# Altium PCB PCB1.PcbDoc
Units mm, origin at the board's own origin, x right, y up, seen from the top; angles counter-clockwise.
Board outline 89.87 x 54.32 mm, 2 copper layers (Top Layer, Bottom Layer); 43 components, 36 nets, 163 pads, 66 vias.
Unrouted connection lines stored in the file: 14.
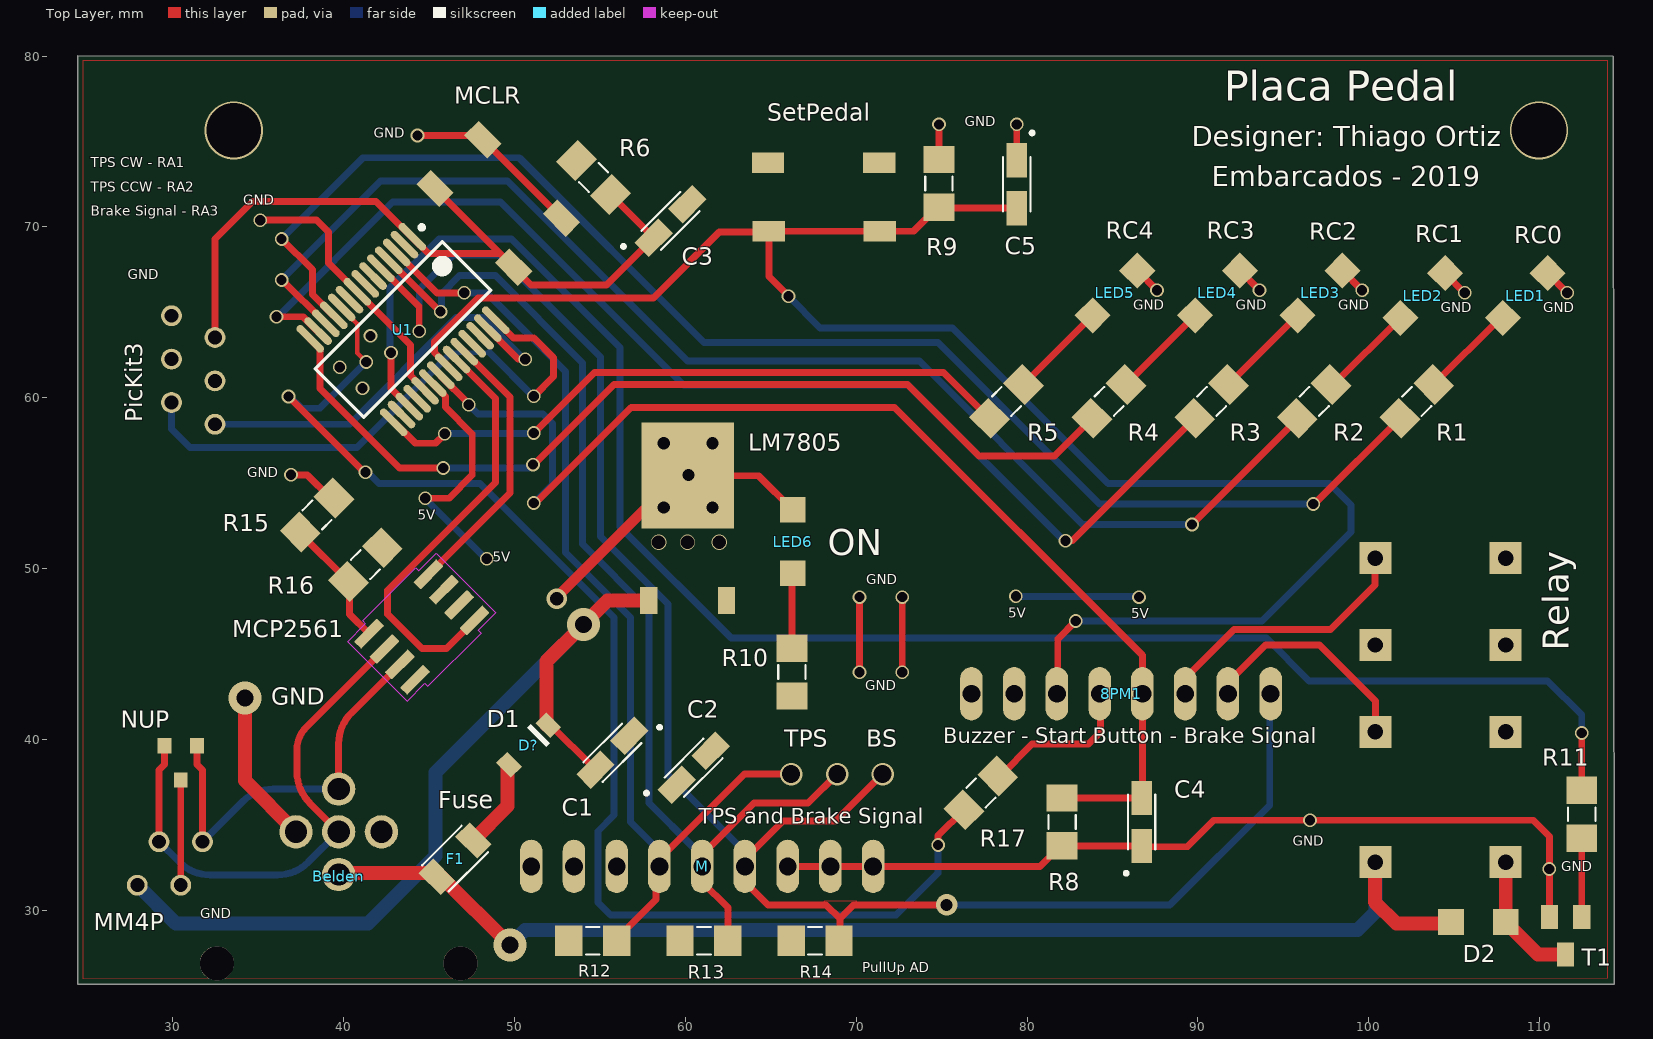
[diagram p0: Top Layer view]
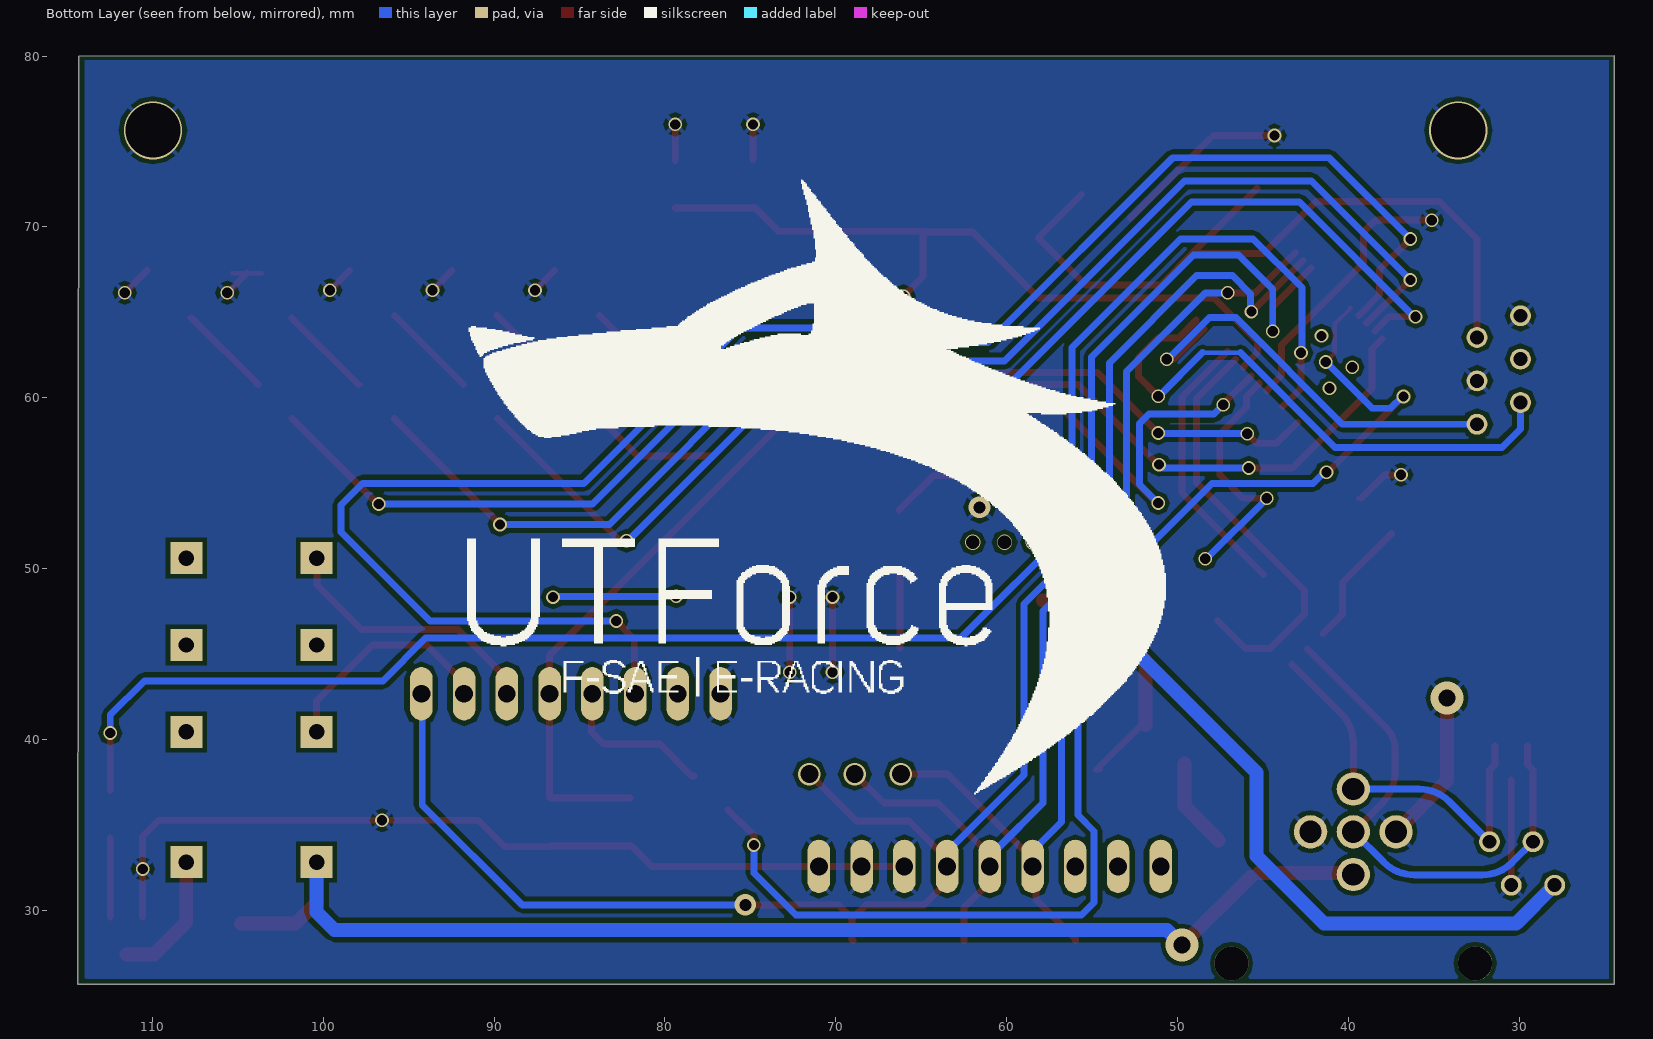
[diagram p1: Bottom Layer view, seen from below]

## Layer stack, top to bottom
Top Solder: solder mask 0.0102, Solder Resist, Dk 3.5
Top Layer: signal copper 0.0356
Dielectric 1: dielectric 0.32, FR-4, Dk 4.8
Bottom Layer: signal copper 0.0356
Bottom Solder: solder mask 0.0102, Solder Resist, Dk 3.5

## Board outline
24.476,25.7 24.476,80.016 24.475,80.016 114.302,79.997 114.35,25.7

## Design rules (kind name [scope] priority, off if disabled: settings)
Clearance [All] p1: gap=0.254 ignorepadtopadclearanceinfootprint=FALSE except(0: Arc-Hole Track-Hole SMDPad-Hole THPad-Hole Via-Hole Fill-Hole Poly-Hole Region-Hole Text-Hole)
PolygonConnect PolygonConnect_20 [All vs IsNamedPolygon('5V')] p1: connectstyle=Relief reliefconductorwidth=0.254 reliefentries=4 polygonreliefangle="45 Angle" airgapwidth=0.254
PolygonConnect PolygonConnect_19 [All vs IsNamedPolygon('5V')] p2: connectstyle=Relief reliefconductorwidth=0.254 reliefentries=4 polygonreliefangle="90 Angle" airgapwidth=0.254
PolygonConnect PolygonConnect_18 [All vs IsNamedPolygon('Bottom Layer-GND')] p3: connectstyle=Relief reliefconductorwidth=0.254 reliefentries=4 polygonreliefangle="45 Angle" airgapwidth=0.254
PolygonConnect PolygonConnect_17 [All vs IsNamedPolygon('GND')] p4: connectstyle=Direct reliefconductorwidth=0.254 reliefentries=4 polygonreliefangle="90 Angle" airgapwidth=0.254
PolygonConnect PolygonConnect_16 [All vs IsNamedPolygon('5V')] p5: connectstyle=Direct reliefconductorwidth=0.254 reliefentries=4 polygonreliefangle="90 Angle" airgapwidth=0.254
PolygonConnect PolygonConnect_15 [All vs IsNamedPolygon('5V')] p6: connectstyle=Relief reliefconductorwidth=0.254 reliefentries=4 polygonreliefangle="45 Angle" airgapwidth=0.254
PolygonConnect PolygonConnect_14 [All vs IsNamedPolygon('GND')] p7: connectstyle=Relief reliefconductorwidth=0.254 reliefentries=4 polygonreliefangle="45 Angle" airgapwidth=0.254
PolygonConnect PolygonConnect_13 [All vs IsNamedPolygon('GND')] p8: connectstyle=Direct reliefconductorwidth=0.254 reliefentries=4 polygonreliefangle="90 Angle" airgapwidth=0.254
PolygonConnect PolygonConnect_12 [All vs IsNamedPolygon('5V')] p9: connectstyle=Direct reliefconductorwidth=0.254 reliefentries=4 polygonreliefangle="90 Angle" airgapwidth=0.254
PolygonConnect PolygonConnect_11 [All vs IsNamedPolygon('5V')] p10: connectstyle=Relief reliefconductorwidth=0.254 reliefentries=4 polygonreliefangle="45 Angle" airgapwidth=0.254
PolygonConnect PolygonConnect_10 [All vs IsNamedPolygon('5V')] p11: connectstyle=Direct reliefconductorwidth=0.254 reliefentries=4 polygonreliefangle="90 Angle" airgapwidth=0.254
PolygonConnect PolygonConnect_9 [All vs IsNamedPolygon('5V')] p12: connectstyle=Direct reliefconductorwidth=0.254 reliefentries=4 polygonreliefangle="90 Angle" airgapwidth=0.254
PolygonConnect PolygonConnect_8 [All vs IsNamedPolygon('5V')] p13: connectstyle=Direct reliefconductorwidth=0.254 reliefentries=4 polygonreliefangle="90 Angle" airgapwidth=0.254
PolygonConnect PolygonConnect_7 [All vs IsNamedPolygon('5V')] p14: thpad.connectstyle=Direct thpad.reliefconductorwidth=0.254 thpad.reliefentries=4 thpad.polygonreliefangle="90 Angle" thpad.airgapwidth=0.254 smdpad.connectstyle=Direct smdpad.reliefconductorwidth=0.254 smdpad.reliefentries=4 smdpad.polygonreliefangle="90 Angle" smdpad.airgapwidth=0.254 via.connectstyle=Relief via.reliefconductorwidth=0.254 via.reliefentries=4 via.polygonreliefangle="90 Angle" via.airgapwidth=0.254
PolygonConnect PolygonConnect_6 [All vs IsNamedPolygon('GND')] p15: thpad.connectstyle=Direct thpad.reliefconductorwidth=0.254 thpad.reliefentries=4 thpad.polygonreliefangle="90 Angle" thpad.airgapwidth=0.254 smdpad.connectstyle=Direct smdpad.reliefconductorwidth=0.254 smdpad.reliefentries=4 smdpad.polygonreliefangle="90 Angle" smdpad.airgapwidth=0.254 via.connectstyle=Relief via.reliefconductorwidth=0.254 via.reliefentries=4 via.polygonreliefangle="90 Angle" via.airgapwidth=0.254
PolygonConnect PolygonConnect_5 [All vs IsNamedPolygon('GND')] p16: thpad.connectstyle=Direct thpad.reliefconductorwidth=0.254 thpad.reliefentries=4 thpad.polygonreliefangle="90 Angle" thpad.airgapwidth=0.254 smdpad.connectstyle=Direct smdpad.reliefconductorwidth=0.254 smdpad.reliefentries=4 smdpad.polygonreliefangle="90 Angle" smdpad.airgapwidth=0.254 via.connectstyle=Relief via.reliefconductorwidth=0.254 via.reliefentries=4 via.polygonreliefangle="90 Angle" via.airgapwidth=0.254
PolygonConnect PolygonConnect_4 [All vs IsNamedPolygon('GND')] p17: thpad.connectstyle=Relief thpad.reliefconductorwidth=0.254 thpad.reliefentries=4 thpad.polygonreliefangle="45 Angle" thpad.airgapwidth=0.254 smdpad.connectstyle=Relief smdpad.reliefconductorwidth=0.254 smdpad.reliefentries=4 smdpad.polygonreliefangle="45 Angle" smdpad.airgapwidth=0.254 via.connectstyle=Relief via.reliefconductorwidth=0.254 via.reliefentries=4 via.polygonreliefangle="90 Angle" via.airgapwidth=0.254
PolygonConnect PolygonConnect_3 [All vs IsNamedPolygon('Top Layer-GND')] p18: thpad.connectstyle=Relief thpad.reliefconductorwidth=0.254 thpad.reliefentries=4 thpad.polygonreliefangle="45 Angle" thpad.airgapwidth=0.254 smdpad.connectstyle=Relief smdpad.reliefconductorwidth=0.254 smdpad.reliefentries=4 smdpad.polygonreliefangle="45 Angle" smdpad.airgapwidth=0.254 via.connectstyle=Relief via.reliefconductorwidth=0.254 via.reliefentries=4 via.polygonreliefangle="90 Angle" via.airgapwidth=0.254
PolygonConnect PolygonConnect_2 [InNet('GND') vs IsNamedPolygon('Top Layer-GND')] p19: connectstyle=Relief reliefconductorwidth=0.254 reliefentries=4 polygonreliefangle="90 Angle" airgapwidth=0.254
PolygonConnect PolygonConnect_1 [All vs InNet('GND')] p20: connectstyle=Relief reliefconductorwidth=0.254 reliefentries=4 polygonreliefangle="45 Angle" airgapwidth=0.254
PolygonConnect [All] p21: connectstyle=Relief reliefconductorwidth=0.254 reliefentries=4 polygonreliefangle="90 Angle" airgapwidth=0.254
RoutingVias [All] p1: holewidth=0.711 width=1.27 viastyle="Through Hole" minholewidth=0.711 minwidth=1.27 maxholewidth=0.711 maxwidth=1.27
SolderMaskExpansion [All] p1: expansion=0.102
Width [All] p1: maxlimit=0.254 minlimit=0.254 preferedwidth=0.254
30 further rules are at their usual default settings.

## Components (designator, comment, footprint, x,y, rotation, side; value= is the part's Value field where it differs from the comment)
8PM1 "8PMolex" PCBComponent_1#1 94.25,42.7 r180 top
Belden "RSWF-5" RSWF-5 39.738,34.624 r0 top locked
C1 "10uF" *CAPMP3216X166 55.75,39.25 r225 top
C2 "" *CAPMP3216X166 60.5,38.369 r45 top
C3 "33uF" *CAPMP3216X166 59.15,70.35 r45 top
C4 "33uF" *CAPMP3216X166 86.7,35.2 r90 top
C5 "33uF" *CAPMP3216X166 79.4,72.5 r270 top
D2 "SMD-DIODE-SWITCHING-75V-150MA(D1206)" *LED-1206_SMD-DIODE-SWITCHING-75V-150MA(D1206)(Primary) 106.4,29.35 r180 top
D? "D1" *SOD123FL_SMF5.0AT1G(Primary) 50.85,39.7 r225 top
F1 "Fuse" *RESC3216X125N 46.547,33.05 r45 top
LED1 "RC0" PCBComponent_1#2 -1189,162.83 r45 top
LED2 "RC1" PCBComponent_1#2 -1195,162.83 r45 top
LED3 "RC2" PCBComponent_1#2 -1201,162.98 r45 top
LED4 "RC3" PCBComponent_1#2 -1207,162.98 r45 top
LED5 "RC4" PCBComponent_1#2 -1213,162.98 r45 top
LED6 "ON" PCBComponent_1#2 -920.1,-797.85 r90 top
LM7805 "Component_1" PCBComponent_1#3 57.8,48.125 r0 top locked
M "9PMolex" PCBComponent_1#4 51,32.6 r0 top locked
MCLR "ButtomSMD" PCBComponent_1#5 49.975,67.65 r135 top (schematic designator buttomMCLR)
MCP2561 "MCP2561 Series High-Speed 1 Mbps 5 V 5 uA CAN Transceiver - SOIC-8" SOIC127P600X175-8N 44.6,46.6 r225 top
MM4P "MM-4P" MICROMATCH-4 29.865,32.77 r180 top
NUP "NUP2105L" NUP2105L 30.5,38.65 r180 top
PicKit3 "MM-6P" MICROMATCH-6 31.23,61.635 r90 top
R1 "330R" *RESC3216X90 102.8,59.8 r45 top
R2 "330R" *RESC3216X90 96.8,59.8 r45 top
R3 "330R" *RESC3216X90 90.8,59.8 r45 top
R4 "330R" *RESC3216X90 84.8,59.8 r45 top
R5 "330R" *RESC3216X90 78.8,59.8 r45 top
R6 "1700R" *RESC3216X90 54.65,72.9 r315 top
R8 "1700R" *RESC3216X90 82.05,35.2 r270 top
R9 "1700R" *RESC3216X90 74.85,72.55 r90 top
R10 "1700R" *RESC3216X90 66.25,43.965 r90 top
R11 "1700R" *RESC3216X90 112.45,35.65 r270 top
R12 "CRCW120635K7FKEA" *RESC3216X90 54.6,28.25 r0 top
R13 "CRCW120635K7FKEA" *RESC3216X90 61.1,28.25 r0 top
R14 "CRCW120635K7FKEA" *RESC3216X90 67.6,28.25 r0 top
R15 "CRCW120635K7FKEA" *RESC3216X90 38.48,53.15 r225 top
R16 "CRCW120635K7FKEA" *RESC3216X90 41.3,50.25 r45 top
R17 "CRCW120635K7FKEA" *RESC3216X90 77.3,36.9 r225 top
Relay "â€¢ Ideal para uso em telecomunicaÃ§Ãµes â€¢ 2 contatos reversÃ­veis bifurcados â€¢ ComutaÃ§Ã£o de cargas a partir de 10 ï­A â€¢ Montagem direta em circuito impresso â€¢ Selado â€¢ Homologado ULâ€¢ 2 contatos reversÃ­veis bifurcados â€¢ ComutaÃ§Ã£o de cargas a partir de 10 ï­A â€¢ Montagem direta em circuito impresso â€¢ Selado â€¢ Homologado UL" ML2RC5 105.46,48.09 r90 top
SetPedal "ButtomSMD" PCBComponent_1#5 64.85,73.75 r0 top (schematic designator SetPedalButtom)
T1 "TBJSOT23" PCBComponent_1#6 112.45,29.65 r180 top
U1 "PIC18F26K80-I/SS" MCHP-SSOP-SS28_L 43.5,64 r315 top

## Footprints (in the part's own frame and the unit in brackets; to place one, negate y for a bottom-side part, rotate by r counter-clockwise, add the part's x,y. Pads: shape width x height; smd on the part's side, far side on the other; paste and mask are expansions set on the pad)
*CAPMP3216X166 [mm]
  rect 2x1.2 smd: 1(1.4,0) 2(-1.4,0)
  silkscreen extent -3.1,-0.8 1.6,1
*LED-1206_SMD-DIODE-SWITCHING-75V-150MA(D1206)(Primary) [mm]
  rect 1.5x1.5 smd: NEG(1.6,0) POS(-1.6,0)
*RESC3216X90 [mm]
  rect 1.6x1.8 smd: 1(-1.4,0) 2(1.4,0)
  silkscreen extent -0.4,-0.8 0.4,0.8
*RESC3216X125N [mm]
  rect 1.2x1.82 smd: 1(-1.505,0) 2(1.505,0)
  silkscreen extent -1.63,-1.09 1.63,1.09
*SOD123FL_SMF5.0AT1G(Primary) [mm]
  rect 0.91x1.22 smd: A(1.625,0) C(-1.625,0)
  silkscreen extent -0.95,-0.78 -0.65,0.8
MCHP-SSOP-SS28_L [mm] "SOP, 28-Leads, Body 10.2x5.3mm, Pitch 0.65mm, IPC High Density"
  oval 2.1x0.45 smd: 1(-3.45,4.225) 2(-3.45,3.575) 3(-3.45,2.925) 4(-3.45,2.275) 5(-3.45,1.625) 6(-3.45,0.975) 7(-3.45,0.325) 8(-3.45,-0.325) 9(-3.45,-0.975) 10(-3.45,-1.625) 11(-3.45,-2.275) 12(-3.45,-2.925) 13(-3.45,-3.575) 14(-3.45,-4.225) 15(3.45,-4.225) 16(3.45,-3.575) 17(3.45,-2.925) 18(3.45,-2.275) 19(3.45,-1.625) 20(3.45,-0.975) 21(3.45,-0.325) 22(3.45,0.325) 23(3.45,0.975) 24(3.45,1.625) 25(3.45,2.275) 26(3.45,2.925) 27(3.45,3.575) 28(3.45,4.225)
  silkscreen extent -3.57,-5.25 2,5.25, body extent -2.8,-5.25 2.8,5.25, height 2
MICROMATCH-4 [mil]
  round 48 / inner round 60 / far side round 48 hole 32: 1(75,50) 2(25,-50) 3(-25,50) 4(-75,-50)
MICROMATCH-6 [mil]
  round 48 / inner round 60 / far side round 48 hole 32: 1(125,50) 2(75,-50) 3(25,50) 4(-25,-50) 5(-75,50) 6(-125,-50)
ML2RC5 [mm]
  rect 1.869x1.869 / inner rect 1.524x1.524 / far side rect 1.869x1.869 hole 0.9: 1(-15.24,5.08) 4(-7.62,5.08) 6(-2.54,5.08) 8(2.54,5.08) 9(2.54,-2.54) 11(-2.54,-2.54) 13(-7.62,-2.54) 16(-15.24,-2.54)
  round 0.9 on Top Paste: MH1(-15.24,5.08) MH2(-7.62,5.08) MH3(-2.54,5.08) MH4(2.54,5.08) MH8(-15.24,-2.54)
  round 0.9 hole 0.9 unplated: MH5(2.54,-2.54) MH6(-2.54,-2.54) MH7(-7.62,-2.54)
NUP2105L [mm]
  rect 0.8x0.9 smd: 1(-0.95,-1) 2(0.95,-1) 3(0,1)
PCBComponent_1#1 [mm]
  oval 1.32x3.12 hole 1.04: 1(0,0) 2(2.5,0) 3(5,0) 4(7.5,0) 5(10,0) 6(12.5,0) 7(15,0) 8(17.5,0)
PCBComponent_1#2 [mm]
  rect 1.5x1.5 smd: 1(847.6,-986.4) 2(851.3,-986.4)
  silkscreen extent 846.7,-988.25 852.2,-985.5
PCBComponent_1#3 [mm]
  rect 1x1.6 smd: 5V(4.625,0.025) 12V(0.075,0.025)
  rect 5.4x6.2 smd: GND(2.35,7.325)
PCBComponent_1#4 [mm]
  oval 1.32x3.12 hole 1.04: 1(0,0) 2(2.5,0) 3(5,0) 4(7.5,0) 5(10,0) 6(12.5,0) 7(15,0) 8(17.5,0) 9(20,0)
PCBComponent_1#5 [mm]
  rect 1.9x1.2 smd: 1(0,0) 1(6.5,0) 2(0.05,-4) 2(6.55,-4)
PCBComponent_1#6 [mm]
  rect 1x1.4 smd: B(0,0) C(0.95,2.2) E(1.9,0)
RSWF-5 [mm]
  round 1.95 / inner round 1.524 / far side round 1.95 hole 1.3: 1(2.5,0) 2(0,-2.5) 3(-2.5,0) 4(0,2.5) 5(0,0)
  round 2 hole 2 unplated: MH1(7.125,-7.7) MH2(-7.125,-7.7)
SOIC127P600X175-8N [mm]
  rrect15% 1.9x0.6 smd: 1(-2.455,1.905) 2(-2.455,0.635) 3(-2.455,-0.635) 4(-2.455,-1.905) 5(2.455,-1.905) 6(2.455,-0.635) 7(2.455,0.635) 8(2.455,1.905)
  Top Layer keep-out lines w0.05: 3.66,-2.46 3.66,2.46 2.2,2.46 2.2,2.7 -2.2,2.7 -2.2,2.46 -3.66,2.46 -3.66,-2.46 -2.2,-2.46 -2.2,-2.7 2.2,-2.7 2.2,-2.46 3.66,-2.46

## Part data
C1 C2 C3 C4 C5: library part 12061A102KAT2A, "1206 1 nF 100 V ±10% Tolerance C0G/NP0 SMT Multilayer Ceramic Capacitor", Package="1206 AVX", Digi-Key_Part_Number=478-5168-1-ND, Digi-Key_Purchase_URL=https://www.digikey.com/product-detail/en/avx-corporation/12061A102KAT2A/478-5168-1-ND/1913258?utm_source=snapeda&utm_medium=aggregator&utm_campaign=symbol, MF=AVX, MP=12061A102KAT2A, SnapEDA_Link=https://www.snapeda.com/parts/12061A102KAT2A/AVX/view-part/?ref=snap
D2: "Diode Small Signal Switching 100V 0.15A 2-Pin Case 1206", Package="1206 Bourns", Availability=Unavailable, MF=Bourns, MP=CD1206-S01575, Price=None, SnapEDA_Link=https://www.snapeda.com/parts/CD1206-S01575/Bourns%20-%20J.W.%20Miller/view-part/?ref=snap
D?: library part SMF5.0AT1G, "Tvs Diode, 200w, 5v, Sod-123fl, Full Reel", Package="SOD-123 Littelfuse", Availability=Unavailable, MF="Littelfuse Inc.", MP=SMF5.0AT1G, Price=None, SnapEDA_Link=https://www.snapeda.com/parts/SMF5.0AT1G/Littelfuse%20Inc./view-part/?ref=snap
F1: library part 0ZCA0075FF2G, "PTC Resettable Fuse 0.75A_hold_ 1.5A_trip_ 6VDC 100A 0.6W 0.2s 0.09Ohm SMD Solder Pad 1206 T/R", Package="1206 Bel Fuse", Availability=Unavailable, MF="Bel Fuse", MP=0ZCA0075FF2G, Price=None, SnapEDA_Link=https://www.snapeda.com/parts/0ZCA0075FF2G/Bel%20Fuse%20Inc./view-part/?ref=snap
LED1 LED2 LED3 LED4 LED5 LED6: library part LED1206
MCP2561: library part MCP2561-E/SN, Package=SOIC127P600X175-8N, Availability=Unavailable, DeviceSetName=MCP2561-E/SN, GateName_1=G$1, LibraryName=MCP2561-E_SN, MF=Microchip, MP=MCP2561-E/SN, Price=None, SymbolName_1=MCP2561-E/SN
R1 R2 R3 R4 R5 R6 R8 R9 R10 R11: library part CRCW120635K7FKEA, "CRCW Series 1206 0.25 W 35.7 kOhm ±1 % ±100 ppm/K SMT Thick Film Chip Resistor", Package="1206 Vishay", Availability=Unavailable, MF="Vishay Dale", MP=CRCW120635K7FKEA, Price=None, SnapEDA_Link=https://www.snapeda.com/parts/CRCW120635K7FKEA/Vishay%20Dale/view-part/?ref=snap
R12 R13 R14 R15 R16 R17: "CRCW Series 1206 0.25 W 35.7 kOhm ±1 % ±100 ppm/K SMT Thick Film Chip Resistor", Package="1206 Vishay", Availability=Unavailable, MF="Vishay Dale", MP=CRCW120635K7FKEA, Price=None, SnapEDA_Link=https://www.snapeda.com/parts/CRCW120635K7FKEA/Vishay%20Dale/view-part/?ref=snap
Relay: library part ML2RC-5V, Package=ML2RC5, DeviceSetName=ML2RC-5V, GateName_1=G$1, LibraryName=ML2RC5, SymbolName_1=ML2R5V
U1: "Enhanced Flash Microcontroller with ECAN(TM) and nanoWatt XLP Technology, 64 MHz, 24 I/O, -40 to 85 degC, 28-pin SSOP (SS28), Tube", Manufacturer=Microchip, Operation Voltage Range="1.8V - 5.5V", Supplier Part Number 1=PIC18F26K80-I/SS-ND, # of A/D Channels=8, ComponentLink1Description=Datasheet, ComponentLink1URL=http://ww1.microchip.com/downloads/en/DeviceDoc/39977f.pdf, ComponentLink2Description="Package Specification", ComponentLink2URL=http://www.microchip.com/stellent/groups/techpub_sg/documents/packagingspec/en012702.pdf, ComponentLink3Description="URL Link1", ComponentLink3URL="Product URL:http://www.microchip.com/datasheet/PIC18F26K80", DatasheetVersion="Rev. F", Digital Communication="2 -A/E/USART, 0 -SPI, 1 -MSSP(SPI/I2C)", EEPROM Data Memory (bytes)=1024, I/O Pins=24, Internal Oscillator="16 MHz, 31 kHz", Max. CPU Speed MHz=64, Memory Type=Flash, Mounting Technology="Surface Mount", PackageDescription="28-Lead Plastic Shrink Small Outline, 10.2 x 5.3 mm Body, 0.65 mm Pitch", PackageReference=SSOP-SS28, PackageVersion="C04-073B, 12/2012", Packing=TUBE, PartNumber=PIC18F26K80-I/SS, Program Memory KBytes=64, Program Memory KWords=32, RAM=3648, RoHS=TRUE, Supplier 1=Digi-Key, Supplier 2=Farnell, Supplier 3=Newark, Supplier 4=Newark, Supplier 5=Mouser, Supplier Part Number 2=1823166, Supplier Part Number 3=76R6688, Supplier Part Number 4=82T9596, Supplier Part Number 5=579-PIC18F26K80-I/SS, Timers="2 - 8-bit, 3 - 16-bit, 0 - 32-bit"
Belden: DeviceSetName=RSWF-5, GateName_1=G$1, LibraryName=RSWF-5, Package=RSWF-5, SymbolName_1=RSWF-5
NUP: DeviceSetName=NUP2105L, GateName_1=G$1, LibraryName=NUP2105L-, Package=NUP2105L, SymbolName_1=NUP2105L

## Via types
v1: diameter 0.8, hole 0.6, Top Layer to Bottom Layer, 48 vias
v2: diameter 1.27, hole 0.711, Top Layer to Bottom Layer, 6 vias
v3: diameter 1.32, hole 1.04, Top Layer to Bottom Layer, 3 vias
v4: diameter 1.93, hole 1, Top Layer to Bottom Layer, 3 vias
v5: diameter 0.9, hole 0.8, Top Layer to Bottom Layer, 3 vias
v6: diameter 3.4, hole 3.2, Top Layer to Bottom Layer, 2 vias
v7: diameter 1.2, hole 0.8, Top Layer to Bottom Layer, 1 vias

## Nets (pads, with @x,y where several pads share a name; then routed paths per layer and width w, separated by ;. In a path a pad name is that pad's centre, name@x,y a point inside that pad or via, vN(x,y) a via of type N, cw(c..) or ccw(c..) an arc to the next point about the centre after c; other vN are vias at no path point)
5V: C2.1 C3.1 LM7805.5V M.1 M.2 M.3 MCP2561.3 PicKit3.3 R6.1 R10.1 R12.1 R13.1 R14.1 R16.2 SetPedal.1 U1.20 | length 21.9
  Top Layer w0.4: v1(44.8,54.132) 46.182,54.132 47.55,55.5 47.55,57.9 45.98,59.47 45.98,60.088 45.25,60.818 U1.20
  Bottom Layer w0.254: v1(79.35,48.4) v1@79.375,48.375 ; v1@86.525,48.375 v1(86.55,48.35)
  Bottom Layer w0.405: v1(44.8,54.132) 48.332,50.6 v1(48.4,50.6) ; v1@79.375,48.375 v1@86.525,48.375
GND: 8PM1.8 Belden.1 Belden.3 C1.2 C2.2 C4.2 C5.2 LED1.2 LED2.2 LED3.2 LED4.2 LED5.2 LED6.2 LM7805.GND M.7 M.8 M.9 MCLR.2 MCP2561.2 MCP2561.8 MM4P.3 NUP.3 PicKit3.1 PicKit3.4 R8.2 R9.2 R15.1 T1.E U1.8 U1.19 | length 136.5
  Top Layer w0.254: R15.1@39.26,54.14 R15.1 ; v1(44.35,75.35) v1@44.357,75.357 ; MCLR.2@47.924,75.357 MCLR.2@48.172,75.11 ; v7(52.5,48.25) v7@52.5,48.35 ; LM7805.GND@59.6,55.45 LM7805.GND ; R8.2@81.95,33.8 R8.2 ; C4.2 C4.2@86.75,33.75 ; v1(87.6,66.3) v1@87.8,66.1 ; LED2.2@103.569,67.3 LED2.2 LED2.2@105.331,67.3
  Top Layer w0.4: v1(70.2,43.95) v1(70.2,48.35) ; v1(72.7,43.95) v1(72.7,48.35)
  Top Layer w0.405: MM4P.3 NUP.3 ; v1(35.15,70.4) 38.45,70.4 39.15,69.7 39.15,67.89 U1.8 40.84,66.21 43.95,63.1 43.95,61.305 44.79,60.464 U1.19 ; v1(36.95,55.5) 37.9,55.5 R15.1@39.26,54.14 ; v1@44.357,75.357 MCLR.2@47.924,75.357 ; MCLR.2@48.172,75.11 MCLR.2@52.768,70.514 ; LM7805.GND 64.3,55.45 LED6.2 ; M.7 M.8 M.9 80.75,32.6 R8.2@81.95,33.8 ; R9.2 v1(74.85,76) ; C5.2 v1(79.4,76) ; R8.2 C4.2 ; LED5.2 v1(87.6,66.3) ; C4.2@86.75,33.75 89.4,33.75 90.95,35.3 v1(96.55,35.3) 109.608,35.3 110.55,34.358 v1(110.55,32.45) T1.E ; LED4.2 v1(93.6,66.3) ; LED3.2 v1(99.6,66.3) ; LED2.2 v1(105.6,66.15) ; LED1.2@110.3,67.45 LED1.2 v1(111.6,66.15)
  Top Layer w0.6: v7@52.5,48.35 LM7805.GND@59.6,55.45
  Top Layer w0.82: v4(34.25,42.45) 34.25,37.612 Belden.3
  other v2: 58.75,53.6 61.6,53.6 60.2,55.5 58.75,57.35 61.6,57.35
  other v6: 33.6,75.65 109.95,75.65
Net8PM1_1: 8PM1.1 M.6 R14.2 U1.5 | length 107.9
  Top Layer w0.405: U1.5 44.45,65.348 v1(44.45,63.9) ; R14.2 69.05,28.3 69.05,29.55 ; v3(71.55,38) 68.8,35.25 65.729,35.25 63.5,33.021 M.6 63.5,31.7 64.85,30.35 68.25,30.35 69.05,29.55 ; v2(75.3,30.35) 69.85,30.35 69.05,29.55
  Bottom Layer w0.254: M.6 M.6@63.5,33.45 ; 8PM1.1@94.2,42.65 8PM1.1
  Bottom Layer w0.405: v1(44.45,63.9) 44.45,66.35 46.45,68.35 49.1,68.35 55.05,62.4 55.05,51.9 59,47.95 59,37.95 M.6@63.5,33.45 ; v2(75.3,30.35) 88.35,30.35 94.2,36.2 8PM1.1@94.2,42.65
Net8PM1_2: 8PM1.2 Relay.4 | length 13.3
  Top Layer w0.254: 8PM1.2 8PM1.2@91.75,43.35
  Top Layer w0.405: 8PM1.2@91.75,43.35 93.95,45.55 97.1,45.55 100.38,42.27 Relay.4
Net8PM1_3: 8PM1.3 Relay.8 | length 15.8
  Top Layer w0.254: 8PM1.3 8PM1.3@89.25,43.6 ; Relay.8@100.35,50.6 Relay.8
  Top Layer w0.405: 8PM1.3@89.25,43.6 92.1,46.45 97.75,46.45 100.35,49.05 Relay.8@100.35,50.6
Net8PM1_4: 8PM1.4 C4.1 R8.1 U1.21 | length 69.8
  Top Layer w0.254: U1.21@45.71,61.285 U1.21 ; v1(47.35,59.6) v1@47.35,59.645 ; v1(51.15,53.85) v1@51.25,53.85 ; C4.1 C4.1@86.75,36.65
  Top Layer w0.405: U1.21@45.71,61.285 v1@47.35,59.645 ; v1@51.25,53.85 56.85,59.45 72.25,59.45 86.75,44.95 8PM1.4 C4.1@86.75,36.65 ; R8.1 C4.1
  Bottom Layer w0.405: v1(47.35,59.6) 47.899,59.051 51.701,59.051 52.25,58.501 52.25,54.95 v1(51.15,53.85)
Net8PM1_5: 8PM1.5 R17.1 | length 9.3
  Top Layer w0.4: R17.1 78.44,37.89 80.3,39.75 83.6,39.75 84.3,40.45 84.3,42.65 8PM1.5
Net8PM1_6: 8PM1.6 C5.1 R9.1 SetPedal.2 U1.22 | length 106
  Top Layer w0.254: 8PM1.6 8PM1.6@81.8,42.75
  Top Layer w0.405: U1.22 46.169,61.843 45.35,62.663 45.35,63.3 47.9,65.85 58.15,65.85 62,69.7 64.85,69.7 SetPedal.2@64.9,69.75 ; v1(66.05,65.95) 64.9,67.1 SetPedal.2@64.9,69.75 ; C5.1 74.9,71.1 R9.1 74.75,71.15 73.35,69.75 71.4,69.75 SetPedal.2@64.9,69.75 ; 8PM1.6@81.8,42.75 81.8,45.9 v1(82.85,46.95)
  Bottom Layer w0.405: v1(66.05,65.95) 67.9,64.1 75.65,64.1 84.75,55 97.7,55 98.95,53.75 98.95,52.15 93.75,46.95 v1(82.85,46.95)
NetBelden_2: Belden.2 D2.NEG F1.1 Relay.1 | length 73.5
  Top Layer w0.254: Belden.2 Belden.2@39.819,32.205 ; F1.1@45.263,32.205 F1.1 ; Relay.1@100.35,32.82 Relay.1
  Top Layer w0.405: F1.1 F1.1@45.764,31.986
  Top Layer w0.813: Relay.1@100.35,32.82 100.35,30.5 101.6,29.25 D2.NEG@104.8,29.25
  Top Layer w0.82: Belden.2@39.819,32.205 F1.1@45.263,32.205 ; F1.1@45.764,31.986 v4(49.75,28)
  Bottom Layer w0.813: v4(49.75,28) 50.64,28.89 99.34,28.89 100.38,29.93 Relay.1
NetBelden_4: Belden.4 MCP2561.7 MM4P.4 NUP.1 | length 23.6
  Top Layer w0.254: MM4P.4@31.723,34.087 MM4P.4
  Top Layer w0.405: NUP.1 31.45,38.55 31.77,38.23 MM4P.4 ; Belden.4 39.738,39.788 cw(c42.278,39.788) 40.482,41.584 MCP2561.7
  Bottom Layer w0.405: MM4P.4 34.11,36.38 cw(c35.906,34.584) 35.906,37.124 Belden.4
NetBelden_5: Belden.5 MCP2561.6 MM4P.2 NUP.2 | length 31.6
  Top Layer w0.254: MM4P.2 MM4P.2@29.277,34.087
  Top Layer w0.405: MM4P.2 29.23,38.23 29.55,38.55 NUP.2 ; Belden.5 38.044,36.318 cw(c39.84,38.114) 37.3,38.114 37.3,39.45 cw(c39.106,39.45) 37.829,40.727 MCP2561.6
  Bottom Layer w0.405: MM4P.2 30.426,32.844 ccw(c32.222,34.64) 32.222,32.1 36.162,32.1 ccw(c36.162,34.64) 37.958,32.844 Belden.5
NetbuttomMCLR_1: C3.2 MCLR.1 PicKit3.2 R6.2 U1.1 | length 44.5
  Top Layer w0.254: U1.1@43.995,69.427 U1.1@44.012,69.427 ; MCLR.1@49.975,67.625 MCLR.1@49.975,67.65 ; C3.2 C3.2@58.16,69.39
  Top Layer w0.405: PicKit3.2 32.5,69.3 34.7,71.5 41.922,71.5 U1.1@43.995,69.427 ; U1.1@44.012,69.427 44.989,68.45 49.175,68.45 ; MCLR.1@45.379,72.246 49.175,68.45 ; MCLR.1@49.975,67.625 51,66.6 55.4,66.6 C3.2 ; MCLR.1@49.975,67.65 49.175,68.45 ; R6.2 C3.2@58.16,69.39
NetC1_1: C1.1 D?.C LM7805.12V MM4P.1 | length 52.5
  Top Layer w0.254: D?.C@51.881,40.881 D?.C@52.139,40.881 ; C1.1@54.503,38.26 C1.1
  Top Layer w0.405: D?.C@52.139,40.881 54.631,38.389 C1.1
  Top Layer w0.82: D?.C@51.881,40.881 51.881,44.581 v4(54.05,46.75) 55.45,48.15 LM7805.12V
  Bottom Layer w0.82: MM4P.1 30.21,29.25 41.45,29.25 45.4,33.2 45.4,38.1 v4(54.05,46.75)
NetD2_POS: D2.POS Relay.16 T1.C | length 7.8
  Top Layer w0.813: Relay.16 D2.POS 109.9,27.45 T1.C
NetD?_A: D?.A F1.2 | length 5.3
  Top Layer w0.82: F1.2 49.619,36.122 D?.A@49.619,38.619
NetLED1_1: LED1.1 R1.2 | length 5.8
  Top Layer w0.254: R1.2 R1.2@103.94,60.79 ; LED1.1@107.684,64.684 LED1.1
  Top Layer w0.405: R1.2 LED1.1@107.684,64.684
NetLED2_1: LED2.1 R2.2 | length 5.7
  Top Layer w0.254: R2.2 R2.2@97.94,60.79
  Top Layer w0.405: R2.2@97.94,60.79 LED2.1
NetLED3_1: LED3.1 R3.2 | length 5.7
  Top Layer w0.405: R3.2 LED3.1
NetLED4_1: LED4.1 R4.2 | length 5.7
  Top Layer w0.405: R4.2 LED4.1
NetLED5_1: LED5.1 R5.2 | length 5.7
  Top Layer w0.405: R5.2 LED5.1
NetLED6_1: LED6.1 R10.2 | length 4.3
  Top Layer w0.405: R10.2 LED6.1@66.25,49.7
NetM_4: M.4 R12.2 U1.3 | length 59.6
  Top Layer w0.254: U1.3 U1.3@43.182,68.508
  Top Layer w0.405: U1.3 45.487,66.15 v1(47.089,66.15) ; R12.2 56,28.35 58.309,30.659 58.309,32.409 M.4 58.5,33.021 63.479,38 v3(66.2,38)
  Bottom Layer w0.254: M.4 M.4@58.5,33.5
  Bottom Layer w0.405: v1(47.089,66.15) 48.4,66.15 53,61.55 53,50.95 56.8,47.15 56.8,35.2 M.4@58.5,33.5
NetM_5: M.5 R13.2 U1.4 | length 64
  Top Layer w0.254: v1@45.667,65.05 v1(45.7,65.05)
  Top Layer w0.405: U1.4 v1@45.667,65.05 ; R13.2 62.5,30.2 61,31.7 M.5 61,33.272 64.028,36.3 67.2,36.3 v3(68.9,38)
  Bottom Layer w0.254: v1(45.7,65.05) 45.7,65.1 v1@45.75,65.15 ; M.5@60.508,33.691 M.5@61,33.199
  Bottom Layer w0.405: v1@45.75,65.15 45.75,66.082 46.818,67.15 48.9,67.15 54,62.05 54,51.45 57.9,47.55 57.9,36.299 M.5@60.508,33.691 ; M.5 M.5@61,33.199
NetMCP2561_1: MCP2561.1 U1.23 | length 25
  Top Layer w0.405: U1.23 48.679,60.2 48.9,59.979 48.9,55.05 42.6,48.75 42.6,47.35 44.6,45.35 46.044,45.35 MCP2561.1
NetMCP2561_4: MCP2561.4 U1.24 | length 16.1
  Top Layer w0.405: MCP2561.4 49.75,54.444 49.75,60.048 U1.24
NetMCP2561_5: MCP2561.5 R15.2 R16.1 | length 7.6
  Top Layer w0.254: R15.2@37.49,52.081 R15.2 ; R16.1 R16.1@40.381,49.189
  Top Layer w0.405: R15.2@37.49,52.081 R16.1 ; R16.1@40.381,49.189 40.381,47.347 MCP2561.5
NetPicKit3_5: PicKit3.5 U1.28 | length 33.5
  Top Layer w0.405: U1.28 49.975,63.5 51.15,63.5 52.3,62.35 52.3,61.25 v1(51.15,60.1)
  Bottom Layer w0.254: 46.35,62.65 48.55,62.65 ; v1@51.1,60.1 v1(51.15,60.1)
  Bottom Layer w0.405: PicKit3.5 29.96,58.19 31.045,57.105 40.805,57.105 46.35,62.65 ; 48.55,62.65 v1@51.1,60.1
NetPicKit3_6: PicKit3.6 U1.27 | length 24.6
  Top Layer w0.254: U1.27@48.467,64.035 U1.27 ; 50.233,62.27 v1(50.65,62.27)
  Top Layer w0.405: U1.27@48.467,64.035 50.233,62.27
  Bottom Layer w0.405: PicKit3.6 40.36,58.46 46.6,64.7 48.15,64.7 v1@50.58,62.27
NetR1_1: R1.1 U1.11 | length 83.6
  Top Layer w0.254: U1.11@39.419,64.831 U1.11 ; v1(96.75,53.8) 96.85,53.9 v1@96.9,53.9
  Top Layer w0.405: v1(36.4,69.3) 38.2,67.5 38.2,66.05 U1.11@39.419,64.831 ; v1@96.9,53.9 R1.1
  Bottom Layer w0.405: v1(36.4,69.3) 41.15,74.05 50.3,74.05 61.1,63.25 74.8,63.25 84.25,53.8 v1(96.75,53.8)
NetR2_1: R2.1 U1.12 | length 76.5
  Top Layer w0.254: v1(36.4,66.9) v1@36.432,66.9 ; U1.12@38.96,64.371 U1.12 U1.12@38.992,64.424 ; v1(89.65,52.6) v1@89.65,52.65
  Top Layer w0.405: v1@36.432,66.9 U1.12@38.96,64.371 ; v1@89.65,52.65 89.7,52.65 95.81,58.76 R2.1
  Bottom Layer w0.405: v1(36.4,66.9) 42.195,72.695 49.605,72.695 60.15,62.15 73.7,62.15 83.25,52.6 v1(89.65,52.6)
NetR3_1: R3.1 U1.13 | length 70.4
  Top Layer w0.254: U1.13@38.48,63.912 U1.13 U1.13@38.533,63.965 ; v1(82.25,51.65) v1@82.65,51.65
  Top Layer w0.405: v1(36.1,64.75) 37.641,64.75 U1.13@38.48,63.912 ; v1@82.65,51.65 R3.1
  Bottom Layer w0.405: v1@36.2,64.75 42.9,71.45 49.2,71.45 59.9,60.75 73.05,60.75 82.15,51.65 v1(82.25,51.65)
NetR4_1: R4.1 U1.14 | length 54.9
  Top Layer w0.254: v1(51.101,56.1) 51.351,56.35 v1@51.4,56.35
  Top Layer w0.405: U1.14 38.656,62.869 38.656,60.544 43.1,56.1 43.3,55.9 v1(45.85,55.9) ; v1@51.4,56.35 55.84,60.79 73,60.79 77.19,56.6 81.6,56.6 R4.1
  Bottom Layer w0.405: v1(45.85,55.9) 50.901,55.9 v1(51.101,56.1)
NetR5_1: R5.1 U1.15 | length 38.1
  Top Layer w0.254: v1(51.15,57.95) v1@51.3,58.1
  Top Layer w0.405: U1.15@43.005,58.573 44.228,57.35 45.396,57.35 45.946,57.9 v1(45.95,57.9) ; v1@51.3,58.1 54.7,61.5 75.12,61.5 R5.1
  Bottom Layer w0.405: v1(45.95,57.9) 45.975,57.925 51.125,57.925 v1(51.15,57.95)
NetR11_1: R11.1 U1.17 | length 100.4
  Top Layer w0.405: v1(42.8,62.65) 42.8,60.563 U1.17 ; R11.1 v1(112.45,40.4)
  Bottom Layer w0.254: v1@42.75,62.95 42.8,62.9 v1(42.8,62.65)
  Bottom Layer w0.405: v1@42.75,62.95 42.75,66.45 45.6,69.3 49.85,69.3 56.2,62.95 56.2,52.45 62.7,45.95 94,45.95 96.5,43.45 110.45,43.45 112.45,41.45 v1(112.45,40.4)
NetR11_2: R11.2 T1.B | length 4.6
  Top Layer w0.405: T1.B R11.2
NetR17_2: R17.2 U1.10 | length 76.7
  Top Layer w0.254: U1.10 39.911,65.237 40.819,64.33 40.819,62.631 v1(41.35,62.1) ; v1@41.238,55.65 v1(41.305,55.65)
  Top Layer w0.4: v1(36.8,60.088) v1@41.238,55.65 ; v1(74.8,33.85) 74.8,34.4 R17.2
  Bottom Layer w0.4: v1(36.8,60.088) 36.862,60.088 37.55,59.4 38.65,59.4 v1(41.35,62.1) ; v1(41.305,55.65) 41.442,55.65 42.092,55 48,55 55.85,47.15 55.85,35.6 54.905,34.655 54.905,30.495 55.65,29.75 72.35,29.75 74.8,32.2 v1(74.8,33.85)
pads on no net: 8PM1.7 Belden.MH1 Belden.MH2 Relay.6 Relay.9 Relay.11 Relay.13 Relay.MH1 Relay.MH2 Relay.MH3 Relay.MH4 Relay.MH5 Relay.MH6 Relay.MH7 Relay.MH8 U1.2 U1.6 U1.7 U1.9 U1.16 U1.18 U1.25 U1.26
copper on no net:
  other v1: 41.135,60.563 39.8,61.79 41.6,63.629
  other v5: 58.45,51.55 60.14,51.55 62,51.55

## Polygon pours and split planes (outlines as drawn)
Net8PM1_1 on Top Layer "Top Layer-Net8PM1_1" (solid, shelved, pour order 38): 69.05,29.55 70.05,30.55 68.1,30.55 69.05,29.6
5V on Top Layer "5V" (solid, shelved, pour order 36): 24.8,79.75 113.95,79.75 113.95,26.043 24.8,26.019
GND on Bottom Layer "Bottom Layer-GND" (solid, pour order 40): 24.8,79.75 24.8,26.019 113.926,26.019 113.95,26.043 113.95,79.75 24.8,79.75

## Silkscreen, mask and mechanical layers (free items; w line width, h text height)
Top Overlay:
  text "Placa Pedal" at 91.55,76.8 h3
  text "GND" at 76.35,75.7 h1
  text "GND" at 41.8,75 h1
  text "Designer: Thiago Ortiz" at 89.65,74.35 h2
  text "TPS CW - RA1" at 25.25,73.3 h1
  text "Embarcados - 2019" at 90.8,72 h2
  text "TPS CCW - RA2" at 25.25,71.85 h1
  text "GND" at 34.15,71.1 h1
  text "Brake Signal - RA3" at 25.25,70.45 h1
  text "GND" at 27.4,66.75 h1
  text "GND" at 86.2,64.95 h1
  text "GND" at 92.2,64.95 h1
  text "GND" at 98.2,64.95 h1
  text "GND" at 104.2,64.8 h1
  text "GND" at 110.2,64.8 h1
  text "GND" at 34.4,55.15 h1
  text "5V" at 44.35,52.682 h1
  text "5V" at 48.75,50.2 h1
  text "GND" at 70.6,48.9 h1
  text "5V" at 78.9,46.95 h1
  text "5V" at 86.1,46.9 h1
  text "GND" at 70.55,42.7 h1
  text "GND" at 35.8,42.05 h1
  text "TPS" at 65.8,39.6 h1
  text "BS" at 70.6,39.6 h1
  text "Buzzer - Start Button - Brake Signal" at 75.1,39.5 h1.52
  text "TPS and Brake Signal" at 60.8,34.8 h1.52
  text "GND" at 95.55,33.6 h1
  text "GND" at 111.25,32.1 h1
  text "GND" at 31.65,29.35 h1
  text "PullUp AD" at 70.35,26.2 h1
Bottom Overlay:
  drawing of 23 lines, arcs and shapes, not listed
bo:
  lines w0.254: 24.45,25.7 114.3,25.7 114.3,80 24.45,80 24.45,25.7